# EAGLE board PCIE_dual_breakout_2L_v0.2-Beta.401e10ff (EAGLE 7.7.0)
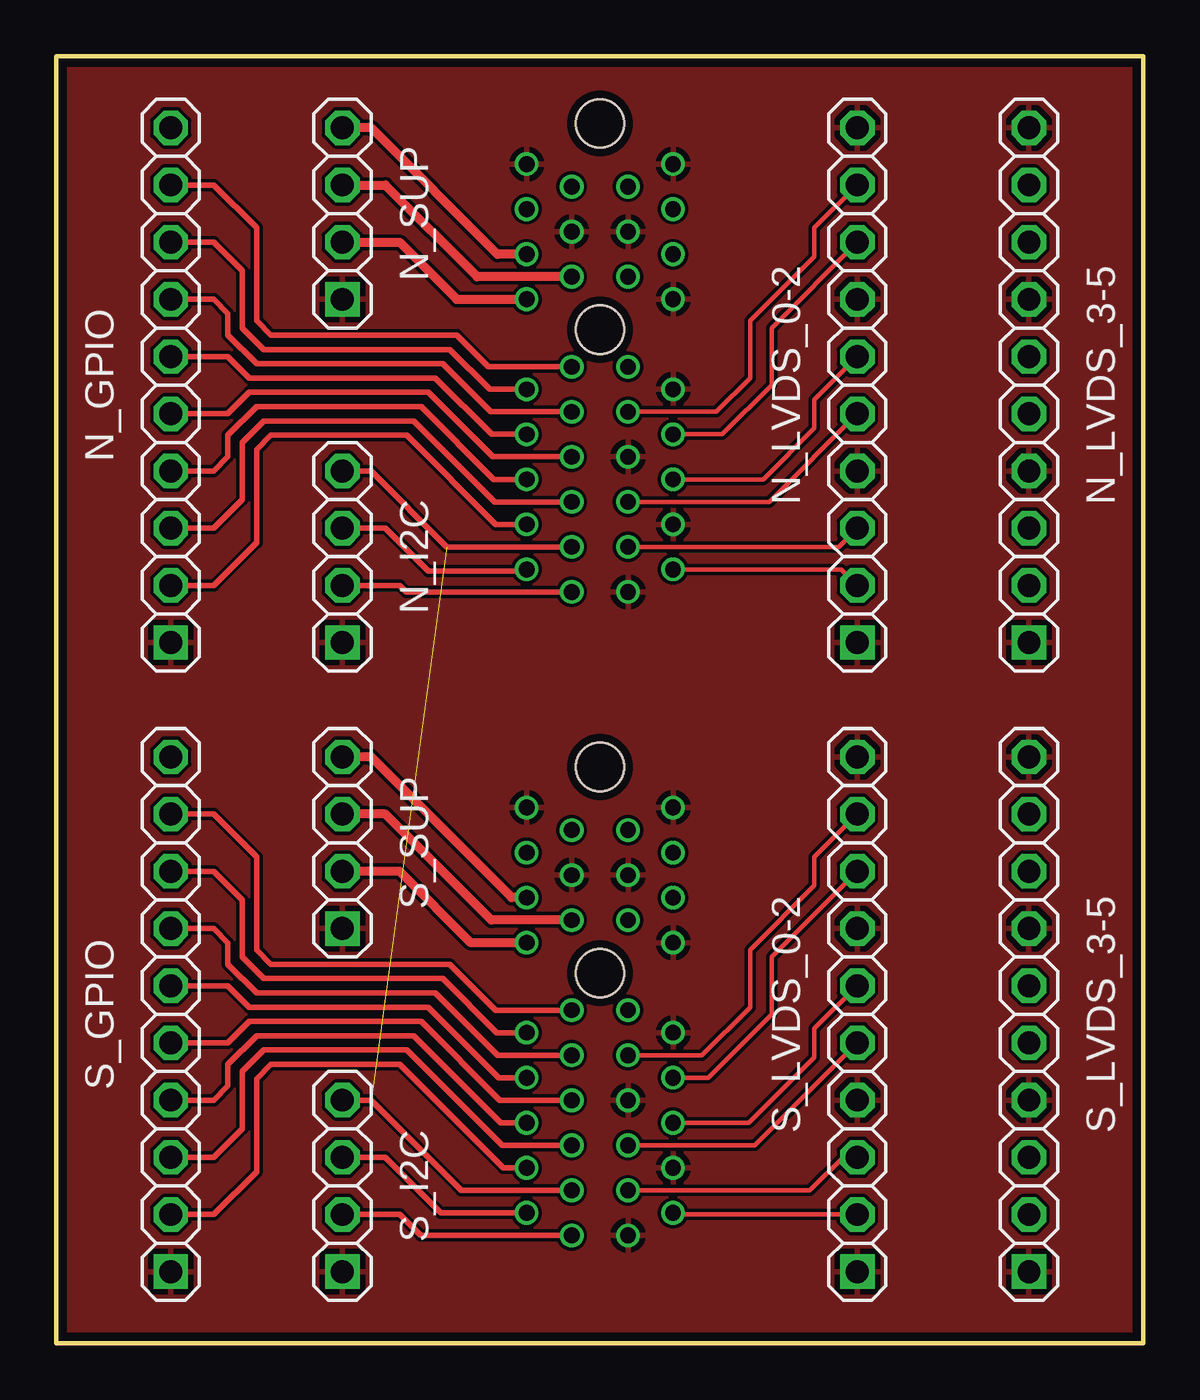
[diagram p0: board, top side]
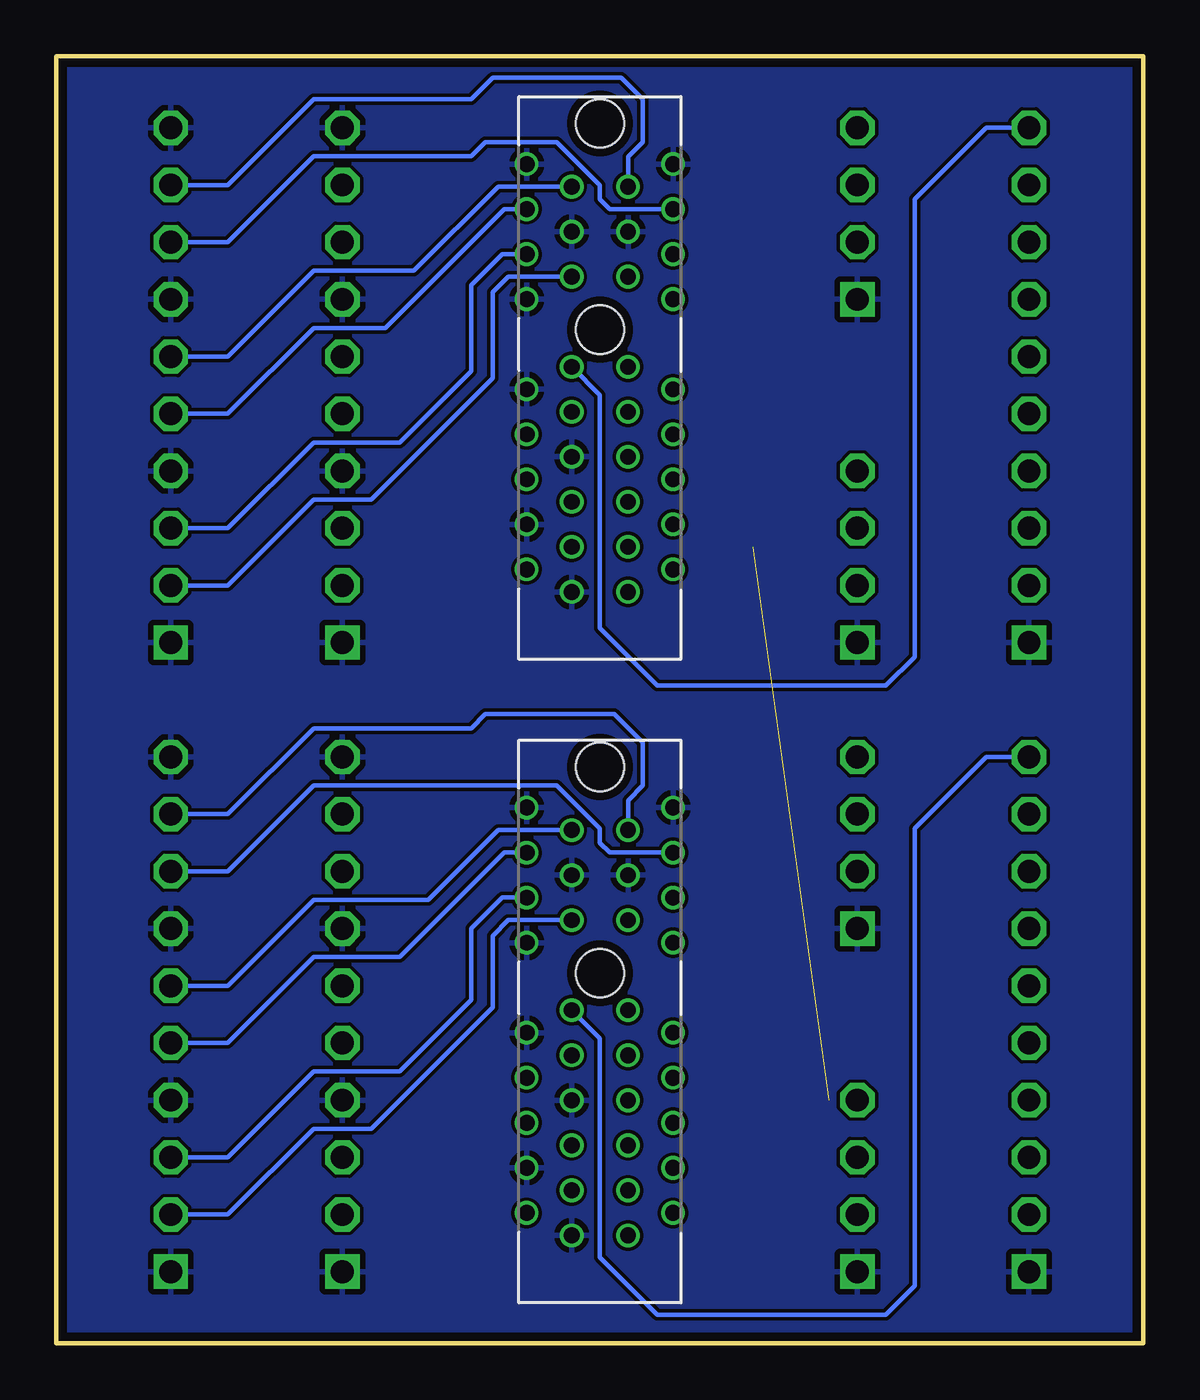
[diagram p1: board, bottom side, seen from below]

Size 48.26 x 57.15 mm. Coordinates in mm from the lower left corner, seen from the top.
Outline: 48.26,57.15 0,57.15 0,0 48.26,0 48.26,57.15
Copper layers (1*16): Top 0.0356mm / dielectric 1.5011mm / Bottom 0.0356mm
Design rules "OSHPark-2layer-new": minimum track width 6mil, minimum drill 10mil, track to track 6mil, track to pad 6mil, pad to pad 6mil, via to via 6mil, smd to smd 6mil, copper to edge 15mil, drill to drill 6mil, minimum pad ring 5mil, minimum via ring 5mil, stop-mask expansion 2mil, vias tented up to drill 15mil, thermal gap 10mil
Net classes: 0 default: width 0.152 mm, drill 0.203 mm; 1 power: width 0.152 mm, drill 0.203 mm

## Footprints (pad centres in the part's own frame; a part is rotated, then mirrored left to right if it is on the bottom)
1X10-S = drill 1.016 square: 1 -11.43,0 | drill 1.016 octagon: 2 -8.89,0; 3 -6.35,0; 4 -3.81,0; 5 -1.27,0; 6 1.27,0; 7 3.81,0; 8 6.35,0; 9 8.89,0; 10 11.43,0
1X04-S = drill 1.016 square: 1 -3.81,0 | drill 1.016 octagon: 2 -1.27,0; 3 1.27,0; 4 3.81,0
PCIE-36 = drill 0.7: A1 -11.65,1.25; A2 -10.65,3.25; A3 -9.65,1.25; A4 -8.65,3.25; A5 -7.65,1.25; A6 -6.65,3.25; A7 -5.65,1.25; A8 -4.65,3.25; A9 -3.65,1.25; A10 -2.65,3.25; A11 -1.65,1.25; A12 1.35,3.25; A13 2.35,1.25; A14 3.35,3.25; A15 4.35,1.25; A16 5.35,3.25; A17 6.35,1.25; A18 7.35,3.25; B1 -11.65,-1.25; B2 -10.65,-3.25; B3 -9.65,-1.25; B4 -8.65,-3.25; B5 -7.65,-1.25; B6 -6.65,-3.25; B7 -5.65,-1.25; B8 -4.65,-3.25; B9 -3.65,-1.25; B10 -2.65,-3.25; B11 -1.65,-1.25; B12 1.35,-3.25; B13 2.35,-1.25; B14 3.35,-3.25; B15 4.35,-1.25; B16 5.35,-3.25; B17 6.35,-1.25; B18 7.35,-3.25 | hole 2.15: 0,0; 9.15,0

## Placement (x,y rotation side)
N_GPIO  [1X10-S]  5.08,42.55 90 top
N_I2C  [1X04-S]  12.7,34.92 90 top
N_LVDS_0-2  [1X10-S]  35.56,42.55 90 top
N_LVDS_3-5  [1X10-S]  43.18,42.55 90 top
N_SUP  [1X04-S]  12.7,50.16 90 top
PCIE-NORTH  PCIE-36-AXIOM-SOCKET  [PCIE-36]  24.13,45.01 90 bottom
PCIE-SOUTH  PCIE-36-AXIOM-SOCKET  [PCIE-36]  24.13,16.44 90 bottom
S_GPIO  [1X10-S]  5.08,14.6 90 top
S_I2C  [1X04-S]  12.7,6.98 90 top
S_LVDS_0-2  [1X10-S]  35.56,14.6 90 top
S_LVDS_3-5  [1X10-S]  43.18,14.6 90 top
S_SUP  [1X04-S]  12.7,22.23 90 top

## Library data of the parts
N_GPIO N_I2C N_LVDS_0-2 N_LVDS_3-5 N_SUP S_GPIO S_I2C S_LVDS_0-2 S_LVDS_3-5 S_SUP = pinhead-2
PCIE-NORTH PCIE-SOUTH = PCIe

## Nets
GND: N_GPIO.1 N_I2C.1 N_LVDS_0-2.1 N_LVDS_0-2.4 N_LVDS_0-2.7 N_LVDS_0-2.10 N_LVDS_3-5.1 N_LVDS_3-5.4 N_LVDS_3-5.7 N_LVDS_3-5.10 N_SUP.1 PCIE-NORTH.A1 PCIE-NORTH.A4 PCIE-NORTH.A7 PCIE-NORTH.A10 PCIE-NORTH.A12 PCIE-NORTH.A15 PCIE-NORTH.A18 PCIE-NORTH.B15 PCIE-NORTH.B18 PCIE-SOUTH.A1 PCIE-SOUTH.A4 PCIE-SOUTH.A7 PCIE-SOUTH.A10 PCIE-SOUTH.A12 PCIE-SOUTH.A15 PCIE-SOUTH.A18 PCIE-SOUTH.B15 PCIE-SOUTH.B18 S_GPIO.1 S_I2C.1 S_LVDS_0-2.1 S_LVDS_0-2.4 S_LVDS_0-2.7 S_LVDS_0-2.10 S_LVDS_3-5.1 S_LVDS_3-5.4 S_LVDS_3-5.7 S_LVDS_3-5.10 S_SUP.1
N_LVDS_0A [power]: N_LVDS_0-2.2 PCIE-NORTH.A2
N_LVDS_0B [power]: N_LVDS_0-2.3 PCIE-NORTH.A3
N_LVDS_1A: N_LVDS_0-2.5 PCIE-NORTH.A5
N_LVDS_1B: N_LVDS_0-2.6 PCIE-NORTH.A6
N_LVDS_2A [power]: N_LVDS_0-2.8 PCIE-NORTH.A8
N_LVDS_2B [power]: N_LVDS_0-2.9 PCIE-NORTH.A9
N_LVDS_3A [power]: N_LVDS_3-5.2 PCIE-NORTH.A13
N_LVDS_3B [power]: N_LVDS_3-5.3 PCIE-NORTH.A14
N_LVDS_4A [power]: N_LVDS_3-5.5 PCIE-NORTH.A16
N_LVDS_4B [power]: N_LVDS_3-5.6 PCIE-NORTH.A17
N_LVDS_5A [power]: N_LVDS_3-5.8 PCIE-NORTH.B16
N_LVDS_5B [power]: N_LVDS_3-5.9 PCIE-NORTH.B17
N_PWRGD: N_GPIO.10 PCIE-NORTH.A11
PCIE_I2C_V [power]: N_I2C.4 PCIE-NORTH.B3 PCIE-SOUTH.B3 S_I2C.4
PCIE_N_5V: N_SUP.2 PCIE-NORTH.B12
PCIE_N_IO0: N_GPIO.2 PCIE-NORTH.B4
PCIE_N_IO1: N_GPIO.3 PCIE-NORTH.B5
PCIE_N_IO2: N_GPIO.4 PCIE-NORTH.B6
PCIE_N_IO3: N_GPIO.5 PCIE-NORTH.B7
PCIE_N_IO4: N_GPIO.6 PCIE-NORTH.B8
PCIE_N_IO5: N_GPIO.7 PCIE-NORTH.B9
PCIE_N_IO6: N_GPIO.8 PCIE-NORTH.B10
PCIE_N_IO7: N_GPIO.9 PCIE-NORTH.B11
PCIE_N_SCL: N_I2C.3 PCIE-NORTH.B2
PCIE_N_SDA: N_I2C.2 PCIE-NORTH.B1
PCIE_N_V: N_SUP.3 PCIE-NORTH.B13
PCIE_N_VCCIO: N_SUP.4 PCIE-NORTH.B14
PCIE_S_5V: PCIE-SOUTH.B12 S_SUP.2
PCIE_S_IO0: PCIE-SOUTH.B4 S_GPIO.2
PCIE_S_IO1: PCIE-SOUTH.B5 S_GPIO.3
PCIE_S_IO2: PCIE-SOUTH.B6 S_GPIO.4
PCIE_S_IO3: PCIE-SOUTH.B7 S_GPIO.5
PCIE_S_IO4: PCIE-SOUTH.B8 S_GPIO.6
PCIE_S_IO5: PCIE-SOUTH.B9 S_GPIO.7
PCIE_S_IO6: PCIE-SOUTH.B10 S_GPIO.8
PCIE_S_IO7: PCIE-SOUTH.B11 S_GPIO.9
PCIE_S_SCL: PCIE-SOUTH.B2 S_I2C.3
PCIE_S_SDA: PCIE-SOUTH.B1 S_I2C.2
PCIE_S_V: PCIE-SOUTH.B13 S_SUP.3
PCIE_S_VCCIO: PCIE-SOUTH.B14 S_SUP.4
S_LVDS_0A: PCIE-SOUTH.A2 S_LVDS_0-2.2
S_LVDS_0B: PCIE-SOUTH.A3 S_LVDS_0-2.3
S_LVDS_1A [power]: PCIE-SOUTH.A5 S_LVDS_0-2.5
S_LVDS_1B [power]: PCIE-SOUTH.A6 S_LVDS_0-2.6
S_LVDS_2A [power]: PCIE-SOUTH.A8 S_LVDS_0-2.8
S_LVDS_2B [power]: PCIE-SOUTH.A9 S_LVDS_0-2.9
S_LVDS_3A: PCIE-SOUTH.A13 S_LVDS_3-5.2
S_LVDS_3B: PCIE-SOUTH.A14 S_LVDS_3-5.3
S_LVDS_4A [power]: PCIE-SOUTH.A16 S_LVDS_3-5.5
S_LVDS_4B [power]: PCIE-SOUTH.A17 S_LVDS_3-5.6
S_LVDS_5A [power]: PCIE-SOUTH.B16 S_LVDS_3-5.8
S_LVDS_5B [power]: PCIE-SOUTH.B17 S_LVDS_3-5.9
S_PWRGD: PCIE-SOUTH.A11 S_GPIO.10

## Tracks (layer width: path | path; a pad name or v marks a point on that pad's centre or on a via)
GND
  pour Top (rank 3): 48.26,0 0,0 0,57.15 48.26,57.15
  pour Bottom (rank 3): 48.26,0 0,0 0,57.15 48.26,57.15
N_LVDS_0A
  Top 0.203: PCIE-NORTH.A2 34.85,34.36 N_LVDS_0-2.2
N_LVDS_0B
  Top 0.203: PCIE-NORTH.A3 34.73,35.36 N_LVDS_0-2.3
N_LVDS_1A
  Top 0.203: PCIE-NORTH.A5 31.65,37.36 N_LVDS_0-2.5
N_LVDS_1B
  Top 0.203: PCIE-NORTH.A6 31.38,38.36 33.66,40.64 33.66,41.91 N_LVDS_0-2.6
N_LVDS_2A
  Top 0.203: PCIE-NORTH.A8 29.57,40.36 31.75,42.55 31.75,45.09 N_LVDS_0-2.8
N_LVDS_2B
  Top 0.203: PCIE-NORTH.A9 29.3,41.36 30.8,42.86 30.8,45.4 33.66,48.26 33.66,49.53 N_LVDS_0-2.9
N_LVDS_3A
  Bottom 0.203: N_LVDS_3-5.2 40.64,33.66 36.83,37.47 34.29,37.47 28.89,42.86 28.89,46.67 28.2,47.36 PCIE-NORTH.A13
N_LVDS_3B
  Bottom 0.203: N_LVDS_3-5.3 40.64,36.2 36.83,40 33.02,40 29.84,43.18 29.84,46.99 28.47,48.36 PCIE-NORTH.A14
N_LVDS_4A
  Bottom 0.203: N_LVDS_3-5.5 40.64,41.27 36.83,45.09 33.66,45.09 28.38,50.36 PCIE-NORTH.A16
N_LVDS_4B
  Bottom 0.203: N_LVDS_3-5.6 40.64,43.81 36.83,47.62 32.38,47.62 28.65,51.36 PCIE-NORTH.A17
N_LVDS_5A
  Bottom 0.203: N_LVDS_3-5.8 40.64,48.89 36.83,52.7 29.84,52.7 29.21,53.34 26.04,53.34 24.13,51.44 24.13,50.8 23.69,50.36 PCIE-NORTH.B16
N_LVDS_5B
  Bottom 0.203: N_LVDS_3-5.9 40.64,51.44 36.83,55.25 29.84,55.25 28.89,56.2 23.18,56.2 22.22,55.25 22.22,53.34 22.88,52.69 PCIE-NORTH.B17
N_PWRGD
  Bottom 0.203: PCIE-NORTH.A11 24.13,42.11 24.13,31.75 21.59,29.21 11.43,29.21 10.16,30.48 10.16,50.8 6.98,53.97 N_GPIO.10
PCIE_I2C_V  (1 unrouted)
  Top 0.254: N_I2C.4 13.97,38.73 17.34,35.36 PCIE-NORTH.B3 | S_I2C.4 13.97,10.79 17.98,6.79 PCIE-SOUTH.B3
PCIE_N_5V
  Top 0.406: N_SUP.2 15.24,48.89 17.77,46.36 PCIE-NORTH.B12
PCIE_N_IO0
  Top 0.254: N_GPIO.2 6.98,33.66 8.89,35.56 8.89,39.69 9.52,40.32 15.56,40.32 19.52,36.36 PCIE-NORTH.B4
PCIE_N_IO1
  Top 0.254: N_GPIO.3 6.98,36.2 8.25,37.47 8.25,40 9.21,40.96 15.87,40.96 19.47,37.36 PCIE-NORTH.B5
PCIE_N_IO2
  Top 0.254: N_GPIO.4 6.98,38.73 7.62,39.37 7.62,40.32 8.89,41.59 16.19,41.59 19.42,38.36 PCIE-NORTH.B6
PCIE_N_IO3
  Top 0.254: N_GPIO.5 7.62,41.27 8.57,42.23 16.51,42.23 19.38,39.36 PCIE-NORTH.B7
PCIE_N_IO4
  Top 0.254: N_GPIO.6 7.62,43.81 8.57,42.86 16.83,42.86 19.33,40.36 PCIE-NORTH.B8
PCIE_N_IO5
  Top 0.254: N_GPIO.7 6.98,46.36 7.62,45.72 7.62,44.77 8.89,43.5 17.14,43.5 19.28,41.36 PCIE-NORTH.B9
PCIE_N_IO6
  Top 0.254: N_GPIO.8 6.98,48.89 8.25,47.62 8.25,45.09 9.21,44.13 17.46,44.13 19.23,42.36 PCIE-NORTH.B10
PCIE_N_IO7
  Top 0.254: N_GPIO.9 6.98,51.44 8.89,49.53 8.89,45.4 9.52,44.77 17.78,44.77 19.18,43.36 PCIE-NORTH.B11
PCIE_N_SCL
  Top 0.254: PCIE-NORTH.B2 20.81,34.29 16.51,34.29 14.6,36.2 N_I2C.3
PCIE_N_SDA
  Top 0.254: N_I2C.2 15.24,33.66 15.53,33.36 PCIE-NORTH.B1
PCIE_N_V
  Top 0.406: N_SUP.3 14.6,51.44 18.68,47.36 PCIE-NORTH.B13
PCIE_N_VCCIO
  Top 0.406: PCIE-NORTH.B14 19.58,48.36 13.97,53.97 N_SUP.4
PCIE_S_5V
  Top 0.406: PCIE-SOUTH.B12 18.41,17.79 15.24,20.95 S_SUP.2
PCIE_S_IO0
  Top 0.254: S_GPIO.2 6.98,5.71 8.89,7.62 8.89,11.75 9.52,12.38 15.24,12.38 19.84,7.79 PCIE-SOUTH.B4
PCIE_S_IO1
  Top 0.254: S_GPIO.3 6.98,8.25 8.25,9.52 8.25,12.06 9.21,13.02 15.56,13.02 19.79,8.79 PCIE-SOUTH.B5
PCIE_S_IO2
  Top 0.254: S_GPIO.4 6.98,10.79 7.62,11.43 7.62,12.38 8.89,13.65 15.87,13.65 19.74,9.79 PCIE-SOUTH.B6
PCIE_S_IO3
  Top 0.254: S_GPIO.5 7.62,13.33 8.57,14.29 16.19,14.29 19.69,10.79 PCIE-SOUTH.B7
PCIE_S_IO4
  Top 0.254: S_GPIO.6 7.62,15.88 8.57,14.92 16.51,14.92 19.64,11.79 PCIE-SOUTH.B8
PCIE_S_IO5
  Top 0.254: S_GPIO.7 6.98,18.41 7.62,17.78 7.62,16.83 8.89,15.56 16.83,15.56 19.6,12.79 PCIE-SOUTH.B9
PCIE_S_IO6
  Top 0.254: S_GPIO.8 6.98,20.95 8.25,19.68 8.25,17.14 9.21,16.19 17.14,16.19 19.55,13.79 PCIE-SOUTH.B10
PCIE_S_IO7
  Top 0.254: S_GPIO.9 6.98,23.49 8.89,21.59 8.89,17.46 9.52,16.83 17.46,16.83 19.5,14.79 PCIE-SOUTH.B11
PCIE_S_SCL
  Top 0.254: S_I2C.3 14.6,8.25 17.07,5.79 PCIE-SOUTH.B2
PCIE_S_SDA
  Top 0.254: S_I2C.2 15.24,5.71 16.17,4.79 PCIE-SOUTH.B1
PCIE_S_V
  Top 0.406: PCIE-SOUTH.B13 19.31,18.79 14.6,23.49 S_SUP.3
PCIE_S_VCCIO
  Top 0.406: PCIE-SOUTH.B14 20.22,19.79 13.97,26.04 S_SUP.4
S_LVDS_0A
  Top 0.203: S_LVDS_0-2.2 27.45,5.71 PCIE-SOUTH.A2
S_LVDS_0B
  Top 0.203: S_LVDS_0-2.3 34.92,8.25 33.46,6.79 PCIE-SOUTH.A3
S_LVDS_1A
  Top 0.203: S_LVDS_0-2.5 31.01,8.79 PCIE-SOUTH.A5
S_LVDS_1B
  Top 0.203: S_LVDS_0-2.6 33.66,13.97 33.66,12.7 30.74,9.79 PCIE-SOUTH.A6
S_LVDS_2A
  Top 0.203: S_LVDS_0-2.8 31.75,17.14 31.75,14.6 28.93,11.79 PCIE-SOUTH.A8
S_LVDS_2B
  Top 0.203: S_LVDS_0-2.9 33.66,21.59 33.66,20.32 30.8,17.46 30.8,14.92 28.66,12.79 PCIE-SOUTH.A9
S_LVDS_3A
  Bottom 0.203: S_LVDS_3-5.2 40.64,5.71 36.83,9.52 34.29,9.52 28.89,14.92 28.89,18.1 28.2,18.79 PCIE-SOUTH.A13
S_LVDS_3B
  Bottom 0.203: S_LVDS_3-5.3 40.64,8.25 36.83,12.06 33.02,12.06 29.84,15.24 29.84,18.41 28.47,19.79 PCIE-SOUTH.A14
S_LVDS_4A
  Bottom 0.203: S_LVDS_3-5.5 40.64,13.33 36.83,17.14 33.02,17.14 28.38,21.79 PCIE-SOUTH.A16
S_LVDS_4B
  Bottom 0.203: S_LVDS_3-5.6 40.64,15.88 36.83,19.68 31.75,19.68 28.65,22.79 PCIE-SOUTH.A17
S_LVDS_5A
  Bottom 0.203: S_LVDS_3-5.8 40.64,20.95 36.83,24.77 26.04,24.77 24.13,22.86 24.13,22.23 23.69,21.79 PCIE-SOUTH.B16
S_LVDS_5B
  Bottom 0.203: S_LVDS_3-5.9 40.64,23.49 36.83,27.3 29.84,27.3 29.21,27.94 23.49,27.94 22.22,26.67 22.22,24.77 22.88,24.11 PCIE-SOUTH.B17
S_PWRGD
  Bottom 0.203: PCIE-SOUTH.A11 24.13,13.54 24.13,3.81 21.59,1.27 11.43,1.27 10.16,2.54 10.16,22.86 6.98,26.04 S_GPIO.10

## Text on the board
_tsilk: Please / keep mask / on both / sides. | Please / keep mask / on both / sides. | Please / keep mask / on both / sides. | Please / keep mask / on both / sides.
_bsilk: N_SUP | N_GPIO | N_LVDS_0-2 | N_LVDS_3-5 | N_I2C | S_SUP | S_GPIO | S_LVDS_0-2 | S_LVDS_3-5 | S_I2C